# Altium PCB charge_battery.PcbDoc
Units mm, origin at the board's own origin, x right, y up, seen from the top; angles counter-clockwise.
Board outline 93.33 x 40.48 mm, 2 copper layers (Top Layer, Bottom Layer); 23 components, 138 nets, 73 pads, 87 vias.
Unrouted connection lines stored in the file: 105.
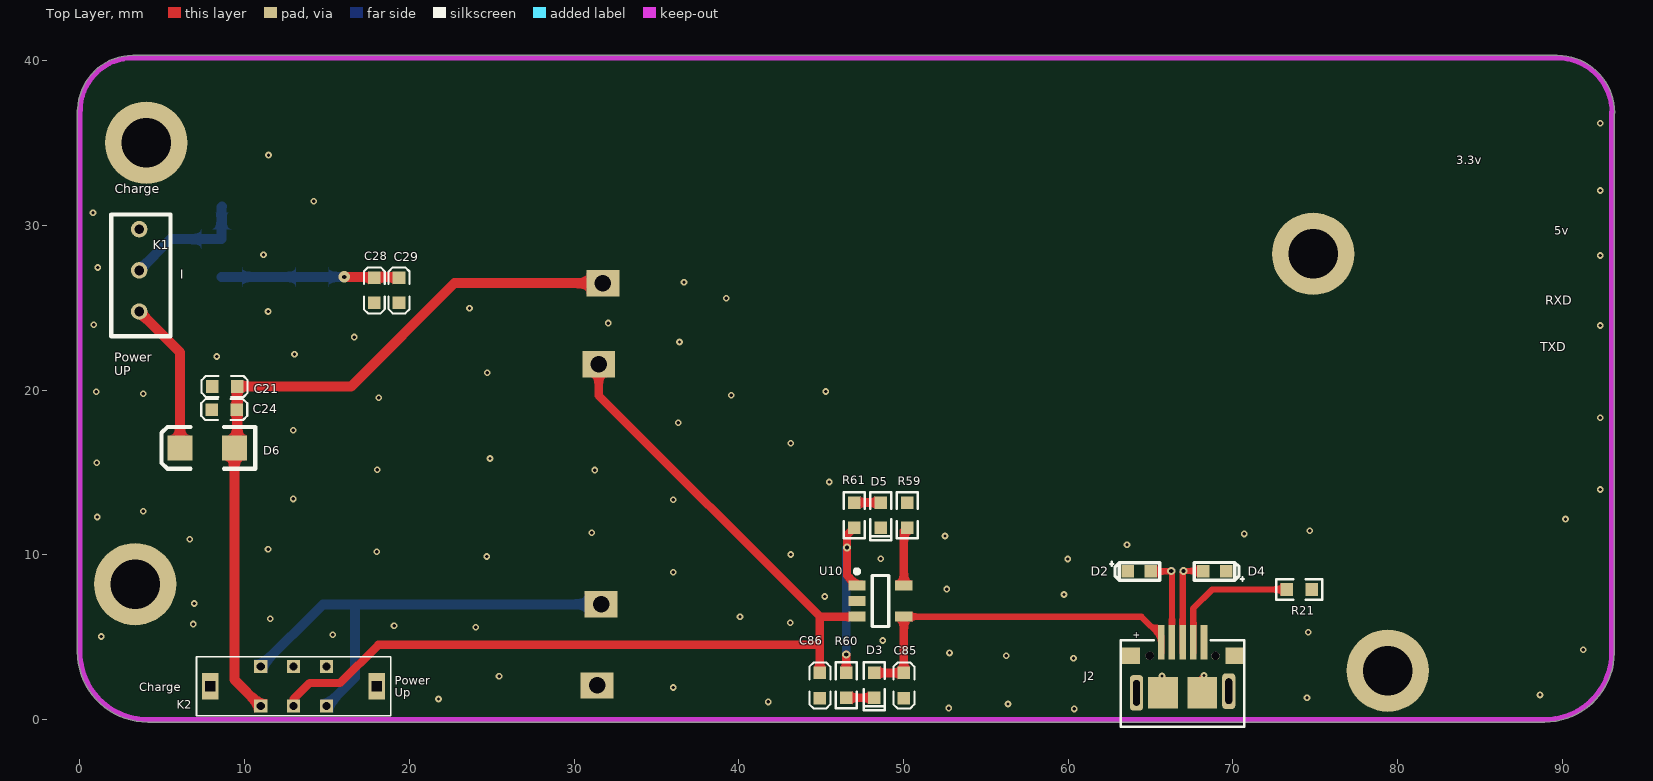
[diagram p0: Top Layer view]
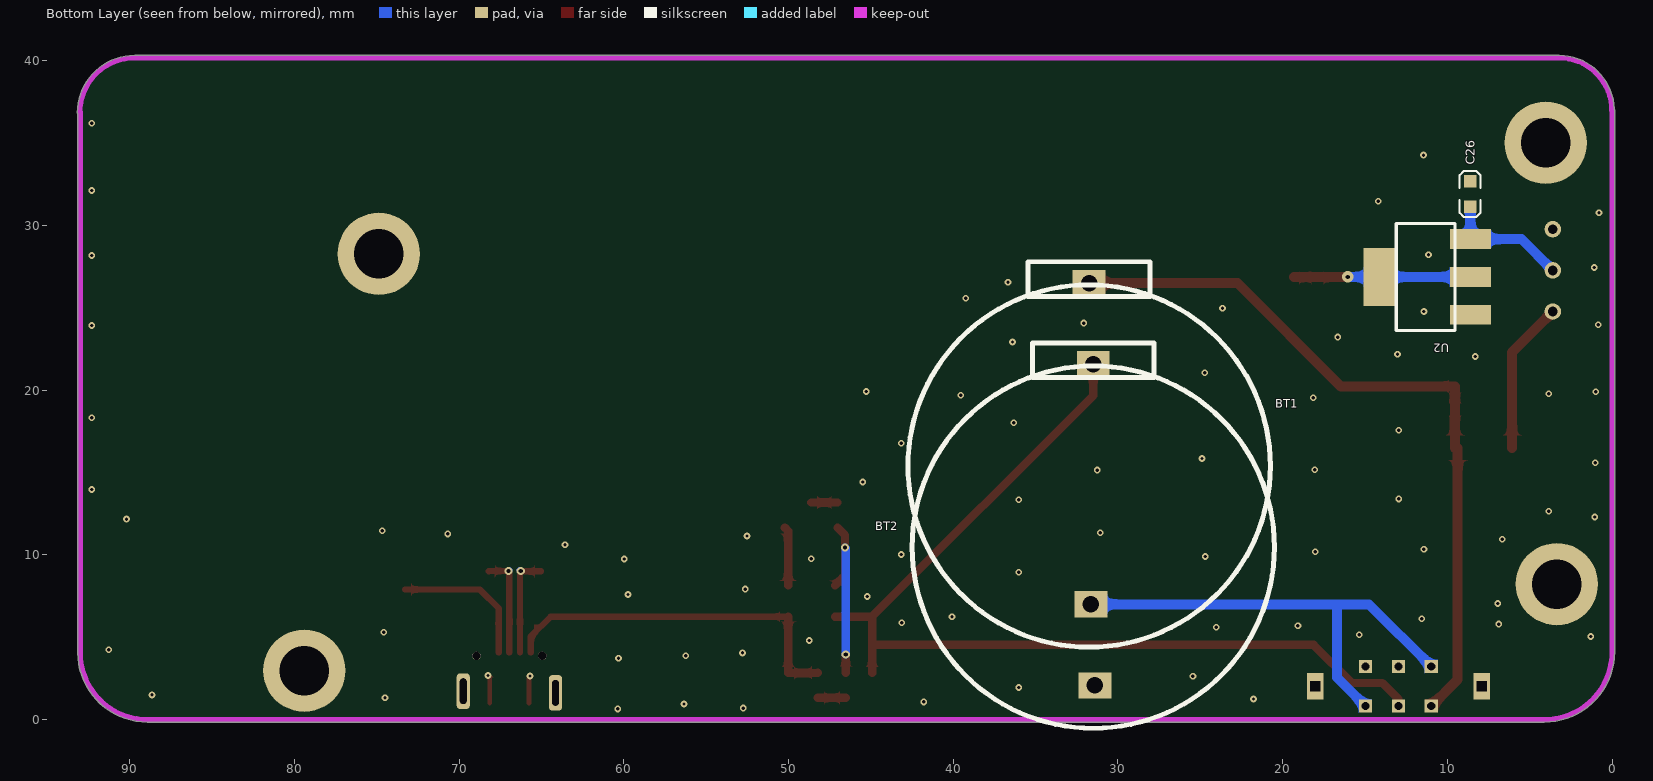
[diagram p1: Bottom Layer view, seen from below]
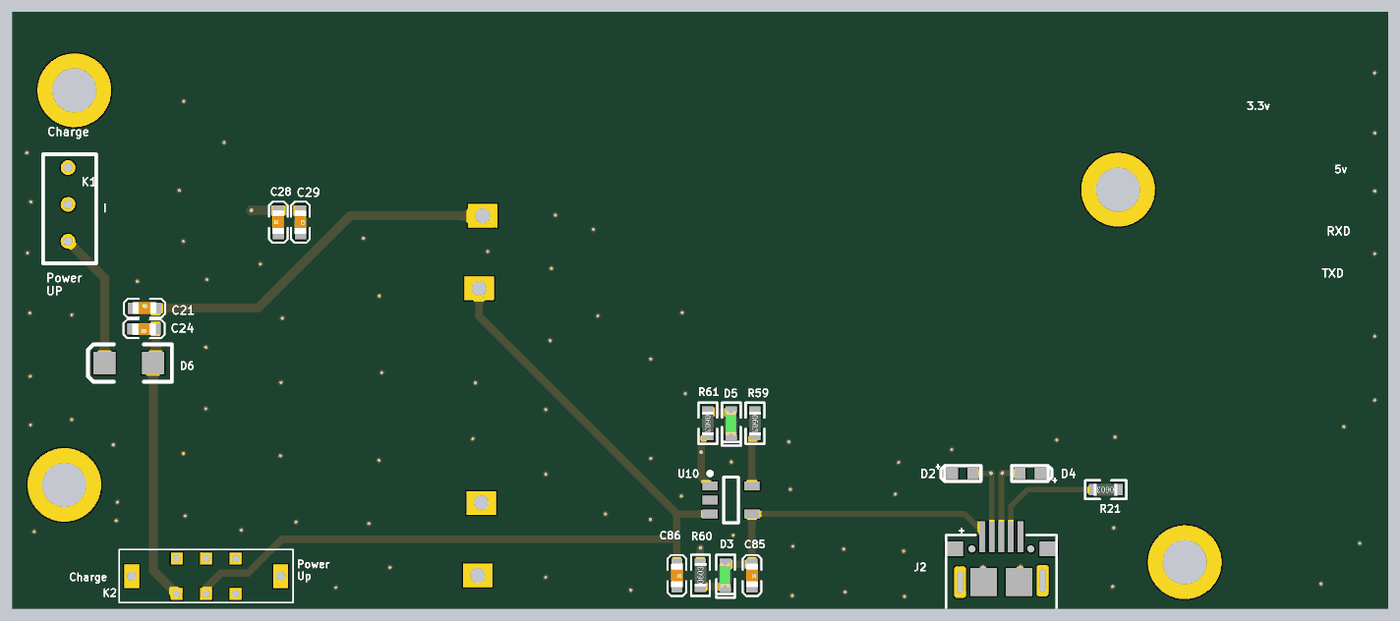
[diagram p2: 3D render of the assembled board from above, using the file's embedded part models]

## Layer stack, top to bottom
Top Solder: solder mask 0.0102, Solder Resist, Dk 3.5
Top Layer: signal copper 0.0356
Dielectric 1: dielectric 0.32, FR-4, Dk 4.8
Bottom Layer: signal copper 0.0356
Bottom Solder: solder mask 0.0102, Solder Resist, Dk 3.5

## Board outline
-0.15,4.125 -0.15,37 cw(c0,37) -0.124,37.086 cw(c3.225,36.975) 3.224,40.325 cw(c3.225,40.175) 3.225,40.325 89.7,40.325 cw(c89.7,36.85) 93.175,36.85 cw(c93.025,36.85) 93.15,36.767 93.15,4.075 cw(c88.925,4.075) 88.925,-0.15 4.125,-0.15 cw(c4.125,4.125)

## Design rules (kind name [scope] priority, off if disabled: settings)
Clearance [All] p1: gap=0.1 except(0.4: SMDPad-Poly THPad-Poly)
HoleSize [All] p1: absolutevalues=TRUE maxlimit=2.54 minlimit=0 maxpercent=80.000 minpercent=20.000
HoleToHoleClearance [All] p1: gap=0 allowstackedmicrovias=TRUE
MinimumSolderMaskSliver [All] p1: minsoldermaskwidth=0
PlaneConnect [ISVIA] p1: planeconnectstyle=Relief reliefexpansion=0.508 reliefentries=4 reliefconductorwidth=0.254 reliefairgap=0.254
PolygonConnect [All] p1: connectstyle=Relief reliefconductorwidth=0.254 reliefentries=4 polygonreliefangle="90 Angle" airgapwidth=0.254
RoutingVias [All] p1: holewidth=0.254 width=0.5 viastyle="Through Hole" minholewidth=0.254 minwidth=0.5 maxholewidth=0.3 maxwidth=0.8
SilkToSilkClearance [All] p1: silktosilkclearance=0
SilkToSolderMaskClearance [IsPad] p1: minsilkscreentomaskgap=0 clearancetoexposedcopper=TRUE
SolderMaskExpansion [All] p1: expansion=0.102
Width [All] p1: maxlimit=0.8 minlimit=0.254 preferedwidth=0.5
24 further rules are at their usual default settings.

## Components (designator, comment, footprint, x,y, rotation, side; value= is the part's Value field where it differs from the comment)
BT1 "Li-battery" LIR2032 31.75,26.5 r0 bottom
BT2 "Li-battery" LIR2032 31.5,21.575 r0 bottom
C21 "104K50V" C0603 8.025,20.225 r0 top
C24 "106K50V" C0603 9.524,18.825 r180 top
C26 "104K50V" C0603 8.625,31.151 r90 bottom
C28 "106K50V" C0603 17.875,25.3 r90 top
C29 "104K50V" C0603 19.375,26.824 r270 top
C85 "475K16V" C0603 50.025,2.834 r270 top
C86 "106K50V" C0603 44.925,2.834 r270 top
D2 "ESDA_TR1/0603" HS_0603D 64.325,9 r0 top
D3 "LED0603G" D-LED0603G 48.225,2.85 r270 top
D4 "ESDA_TR1/0603" HS_0603D 68.899,9.001 r180 top
D5 "LED0603G" D-LED0603G 48.625,13.174 r270 top
D6 "500mA/13.2V" D1206 9.375,16.5 r180 top
J2 "USB-MINI-SOCKET" "MICRO-USB - 5.9" 65.65,4.7 r0 top
K1 "SS-12D00" SS-12D00 3.6,29.775 r270 top
K2 "SK-22D02" SK-22D02 12.975,0.825 r0 top
R21 "0R" R0603 74.799,7.9 r180 top
R59 "R0603-15KF" R0603 50.225,13.174 r270 top
R60 "470RF" R0603 46.525,1.323 r90 top
R61 "470RF" R0603 47.025,13.174 r270 top
U2 "AMS1117_5V" SOT-223 8.6,26.875 r90 bottom
U10 "MCP73831" SOT23-5N 48.6,7.2 r0 top

## Footprints (in the part's own frame and the unit in brackets; to place one, negate y for a bottom-side part, rotate by r counter-clockwise, add the part's x,y. Pads: shape width x height; smd on the part's side, far side on the other; paste and mask are expansions set on the pad)
C0603 [mil]
  rect 30x30 smd: 1(0,0) 2(60,0)
  silkscreen extent -25,-25 85,25, body extent -1,-15 61,16, height 12
D1206 [mil]
  rect 60x60 smd: 1(0,0) 2(130,0)
  silkscreen extent -50,-50 174,50, body extent -22,-40 151,40, height 47
D-LED0603G [mil]
  rect 30x30 smd: 1(0,0) 2(60,0)
  silkscreen extent -25,-25 90,25, body extent -2,-16 62,15, height 24
HS_0603D [mil]
  rect 30x30 smd: 1(-27.5,0) 2(27.5,0)
  silkscreen extent -70,-21 49,23
LIR2032 [mm] "LIR2032 -- 2 Pin"
  rect 2x1.6 hole 1: 1(0,0) 2(-0.1,19.5)
  silkscreen extent -11,-1.3 11,22.1
"MICRO-USB - 5.9" [mm]
  rrect50% 0.8x2.15 hole 0.4 slot 1.55 at 90 deg: 0(-1.5,-3.075) 0(4.1,-2.975)
  rect 0.4x2.1 smd: 1(0,0) 2(0.65,0) 3(1.3,0) 4(1.95,0) 5(2.6,0)
  rect 1.2x1 smd: 6(-1.9,-0.825) 7(4.5,-0.825)
  rect 1.8x1.9 smd: 8(0.106,-3.075) 9(2.493,-3.075)
  round 0.5 hole 0.5 unplated: ""(-0.7,-0.825) ""(3.3,-0.825)
  silkscreen extent -2.45,-5.13 5.05,0.12
R0603 [mil]
  rect 30x30 smd: 1(0,0) 2(60,0)
  silkscreen extent -25,-25 85,25, body extent 0,-16 62,15, height 18
SK-22D02 [mm] "2档6脚"
  rect 0.8x0.8 hole 0.5: 1(-2,0) 2(0,0) 3(2,0) 4(2,2.4) 5(0,2.4) 6(-2,2.4)
  rect 1x1.6 hole 0.6 square: 7(-5.05,1.2) 8(5.05,1.2)
  silkscreen extent -5.9,-0.6 5.9,3
SOT23-5N [mm] "SOT23, 5-Leads, Body 2.90x2.70mm, Pitch 0.95mm, IPC Medium Density"
  rect 1.05x0.6 smd: 1(-1.425,0.95) 2(-1.425,0) 3(-1.425,-0.95) 4(1.425,-0.95) 5(1.425,0.95)
  silkscreen extent -1.55,-1.55 0.5,1.92, body extent -0.9,-1.55 0.9,1.55, height 1.45
SOT-223 [mm]
  rect 1.2x2.5 smd: 1(-2.3,0) 2(0,0) 3(2.3,0)
  rect 3.5x2 smd: 2(0,5.5)
  silkscreen extent -3.25,0.94 3.25,4.5
SS-12D00 [mm] "SS-12D00(1P2T) 立式 柄高5MM"
  round 1 hole 0.6: 1(0,0) 2(2.5,0) 3(5,0)
  silkscreen extent -0.9,-1.7 6.5,1.9

## Part data
BT1 BT2: library part Li-batttery, "纽扣电池LIR2023"
C21 C26 C29: library part C0603X7R-104K50V, "贴片电容-陶瓷"
C24 C28 C86: library part C0603X7R-106K50V, "贴片电容-陶瓷"
C85: library part C0603X7R-475K16V, "贴片电容-陶瓷"
D2 D4: library part "D Zener", "Zener Diode"
D3 D5: library part DLED-0603-G, "贴片二极管-LED"
D6: library part 1206MSD, "500mA/13.2V 自恢复保险丝"
J2: library part J-USB-MINI-SOCKET, "USB-A卧式插座"
K1: library part "SS-12D00(1P2T) 立式 柄高5MM"
K2: "波动开关-2档6脚"
R21: library part R0603-0R, "贴片电阻-通用"
R59: "贴片电容-通用"
R60 R61: library part R0603-470RF, "贴片电阻-通用"
U2: library part AMS1117-5V
U10: "charge IC"

## Free pads (board coordinates)
  round 5 hole 3: 0(3.35,8.225) 0(4.025,35.025) 0(74.875,28.275) 0(79.4,2.975)

## Via types
v1: diameter 0.406, hole 0.203, Top Layer to Bottom Layer, tented both sides, 82 vias
v2: diameter 0.5, hole 0.254, Top Layer to Bottom Layer, tented both sides, 4 vias
v3: diameter 0.7, hole 0.254, Top Layer to Bottom Layer, tented both sides, 1 vias

## Nets (pads, with @x,y where several pads share a name; then routed paths per layer and width w, separated by ;. In a path a pad name is that pad's centre, name@x,y a point inside that pad or via, vN(x,y) a via of type N, cw(c..) or ccw(c..) an arc to the next point about the centre after c; other vN are vias at no path point)
+5V: C28.2 C29.1 U2.2 | length 10.7
  Top Layer w0.6: v3(16.05,26.875) C29.1@19.324,26.875
  Bottom Layer w0.6: U2.2@8.6,26.875 14.1,26.875 v3(16.05,26.875)
/CS: 
/DRDY: 
/PWDN: 
/RESET: 
A2: 
AGND: pad.0@4.025,35.025 pad.0@74.875,28.275
AVCC: 
BIAS: 
BIASINV: 
BT1: BT1.1 C21.2 C24.1 D6.1 K2.1 | length 48.6
  Top Layer w0.6: D6.1 9.375,2.425 K2.1 ; D6.1@9.549,16.5 C21.2 ; D6.1@9.55,16.5 C21.2 16.475,20.225 22.75,26.5 BT1.1
BT2: BT2.1 C86.1 K2.2 U10.3 | length 60.3
  Top Layer w0.5: K2.2 12.975,1.25 13.95,2.225 15.8,2.225 18.117,4.542 44.925,4.542 ; BT2.1 31.5,19.675 44.925,6.25 ; C86.1 44.925,4.542 ; U10.3 44.925,6.25 ; 44.925,4.542 44.925,6.25
BT_G: BT1.2 K2.3 K2.6 | length 29.1
  Bottom Layer w0.6: K2.6 14.75,7 16.7,7 ; K2.3 16.7,2.55 16.7,7 ; BT1.2 16.7,7
C3: 
C4: 
CLK: 
CZ: 
DGND: BT2.2 C21.1 C24.2 C26.2 C28.1 C29.2 C85.2 C86.2 D2.1 D4.1 D5.2 J2.5 J2.6 J2.7 J2.8 J2.9 K2.5 K2.7 K2.8 pad.0@3.35,8.225 pad.0@79.4,2.975 R21.1 R59.1 U2.1 U10.2 | length 3.4
  Top Layer w0.3: v1(65.7,2.65) 65.756,2.594 J2.8 J2.8@65.756,1 ; J2.9@68.143,1 J2.9 68.143,2.568 v1(68.25,2.675)
  other v1: 60.375,0.65 52.75,0.7 56.35,0.95 41.8,1.075 21.775,1.25 74.5,1.325 88.65,1.5 36.025,1.95 25.45,2.625 60.325,3.725 56.25,3.875 52.8,4.05 91.275,4.25 48.75,4.8 1.3,5.05 15.35,5.15 74.575,5.3 24.025,5.6 19.075,5.7 6.875,5.8 43.125,5.875 11.55,6.125 40.075,6.25 6.95,7.05 45.225,7.475 59.75,7.6 52.625,7.925 36.025,8.95 59.975,9.75 48.625,9.775 24.7,9.9 43.15,10.025 18.025,10.2 11.425,10.35 63.575,10.625 6.675,10.95 52.525,11.15 70.7,11.275 31.075,11.35 74.675,11.475 90.2,12.175 1.05,12.3 3.85,12.65 36.025,13.35 12.95,13.4 92.3,13.975 45.5,14.425 31.25,15.15 18.05,15.175 1.025,15.6 24.9,15.85 43.15,16.775 12.95,17.575 36.325,18.025 92.3,18.325 18.15,19.55 39.55,19.7 3.85,19.775 1,19.9 45.275,19.925 24.725,21.05 8.3,22.05 13.025,22.175 36.4,22.925 16.65,23.225 92.3,23.925 0.85,23.975 32.075,24.075 11.425,24.775 23.65,24.975 39.25,25.575 36.675,26.55 1.075,27.45 92.3,28.175 11.15,28.225 0.8,30.775 14.2,31.475 92.3,32.125 11.45,34.275 92.3,36.2
DIN: 
DM: D2.2 J2.2 | length 6.3
  Top Layer w0.381: D2.2 66.231,9 v2(66.256,9.025) 66.3,8.98 J2.2 J2.2@66.3,4.075
  Bottom Layer w0.381: v2(66.256,9.025) 66.265,9.025 v2@66.315,9.075
DOUT_1: 
DOUT_2: 
DOUT_3: 
DOUT_4: 
DP: D4.2 J2.3 | length 6.3
  Top Layer w0.381: J2.3@66.95,4.075 J2.3 66.95,8.966 v2(67.01,9.025) 68.175,9.025 D4.2@68.2,9
  Bottom Layer w0.381: v2@66.95,9.075 67,9.025 v2(67.01,9.025)
DVCC: 
ELEC1: 
ELEC2: 
ELEC3: 
ELEC4: 
F3: 
F4: 
F7: 
F8: 
FP1: 
FP2: 
FZ: 
NetC4_1: 
NetC6_1: 
NetC6_2: 
NetC7_1: 
NetC8_1: 
NetC8_2: 
NetC9_1: 
NetC9_2: 
NetC10_1: 
NetC11_1: 
NetC12_1: 
NetC13_1: 
NetC14_1: 
NetC15_1: 
NetC16_1: 
NetC17_1: 
NetC20_1: 
NetC20_2: 
NetC39_1: 
NetC39_2: 
NetC40_1: 
NetC40_2: 
NetC41_1: 
NetC42_1: 
NetC43_1: 
NetC44_1: 
NetC45_1: 
NetC46_1: 
NetC47_1: 
NetC48_1: 
NetC49_1: 
NetC50_1: 
NetC51_1: 
NetC52_1: 
NetC53_1: 
NetC54_1: 
NetC56_1: 
NetC57_1: 
NetC58_1: 
NetC59_1: 
NetC67_1: 
NetC67_2: 
NetC71_1: 
NetC71_2: 
NetC72_1: 
NetC73_1: 
NetC74_1: 
NetC75_1: 
NetC76_1: 
NetC77_1: 
NetC78_1: 
NetC79_1: 
NetC80_1: 
NetD1_1: 
NetD3_2: D3.2 R60.1 | length 1.7
  Top Layer w0.5: R60.1 46.528,1.326 D3.2
NetD5_1: D5.1 R61.1 | length 1.6
  Top Layer w0.5: R61.1 D5.1
NetD6_2: D6.2 K1.3 | length 9.3
  Top Layer w0.6: K1.3 6.073,22.302 D6.2
NetJ1_1: 
NetJ1_2: 
NetJ2_4: J2.4 R21.2 | length 8.8
  Top Layer w0.381: J2.4@67.6,4.075 J2.4 67.6,6.75 68.75,7.9 R21.2
NetL1_2: 
NetM1_42: 
NetM1_44: 
NetM1_45: 
NetM1_46: 
NetM2_42: 
NetM2_44: 
NetM2_45: 
NetM2_46: 
NetM3_42: 
NetM3_44: 
NetM3_45: 
NetM3_46: 
NetM4_42: 
NetM4_44: 
NetM4_45: 
NetM4_46: 
NetR59_2: R59.2 U10.5 | length 3.6
  Top Layer w0.5: U10.5 50.025,11.45 R59.2
NetR60_2: R60.2 R61.2 U10.1 | length 11.6
  Top Layer w0.5: R60.2 v2(46.525,3.95) ; R61.2 46.575,11.2 v2(46.575,10.45) 46.575,8.75 U10.1
  Bottom Layer w0.5: v2(46.525,3.95) 46.525,10.4 v2(46.575,10.45)
O1: 
O2: 
P3: 
P4: 
PZ: 
REF: 
RST: 
RXD: 
SCLK: 
START: 
T3: 
T4: 
T5: 
T6: 
TXD: 
VBUS: C85.1 D3.1 J2.1 U10.4 | length 22.3
  Top Layer w0.381: U10.4 64.45,6.25 65.65,5.05 J2.1 J2.1@65.65,4.075
  Top Layer w0.5: D3.1 48.241,2.834 C85.1 U10.4
VIN: C26.1 K1.2 U2.3 | length 7.8
  Bottom Layer w0.6: K1.2 5.5,29.175 U2.3 8.6,31.126 C26.1
VREFP_1: 
VREFP_2: 
VREFP_3: 
VREFP_4: 
XI/SCS_: 
pads on no net: J2. J2.0 K1.1 K2.4

## Keep-outs
Keep-Out Layer:
  lines w0.3: 0,37 0,4.125 ccw(c4.125,4.125) 4.125,0 88.925,0 ccw(c88.925,4.075) 93,4.075 93,36.9 ; 0.025,36.975 cw(c3.225,36.975) 3.225,40.175 89.7,40.175 cw(c89.7,36.85) 93.025,36.85

## Silkscreen, mask and mechanical layers (free items; w line width, h text height)
Top Overlay:
  text "4.5v" at 27.4,45.85 h0.5
  text "4.5v" at 46.175,45.575 h0.5
  text "4.5v" at 7.75,45.275 h0.5
  text "4.5v" at 65,45.225 h0.5
  text "3.3v" at 83.55,33.725 h0.5
  text "5v" at 89.5,29.425 h0.5
  text "RXD" at 88.975,25.2 h0.55
  text "TXD" at 88.65,22.35 h0.55
  text "Charge" at 3.6,1.725 h0.5
  text "Power / Up" at 19.125,1.375 h0.5

## Dimensions
3.225,40.175 to 4.125,0 on Keep-Out Layer

## Text inside footprints (layer, text, board x,y; h text height)
J2: Top Overlay "+" at 63.937,4.952 h0.4
K1: Top Overlay "Charge" at 2.125,31.95 h0.55; Top Overlay "I" at 6.3,27.325 h0.55 r180; Top Overlay "Power / UP" at 2.1,20.9 h0.55